# Altium PCB Sensor.PcbDoc
Units mm, origin at the board's own origin, x right, y up, seen from the top; angles counter-clockwise.
Board outline 35 x 15 mm, 4 copper layers (Top Layer 1, Top Layer 2, Bottom Layer 3, Bottom Layer 4), stack 0.603 mm thick; 64 components, 54 nets, 223 pads, 83 vias.
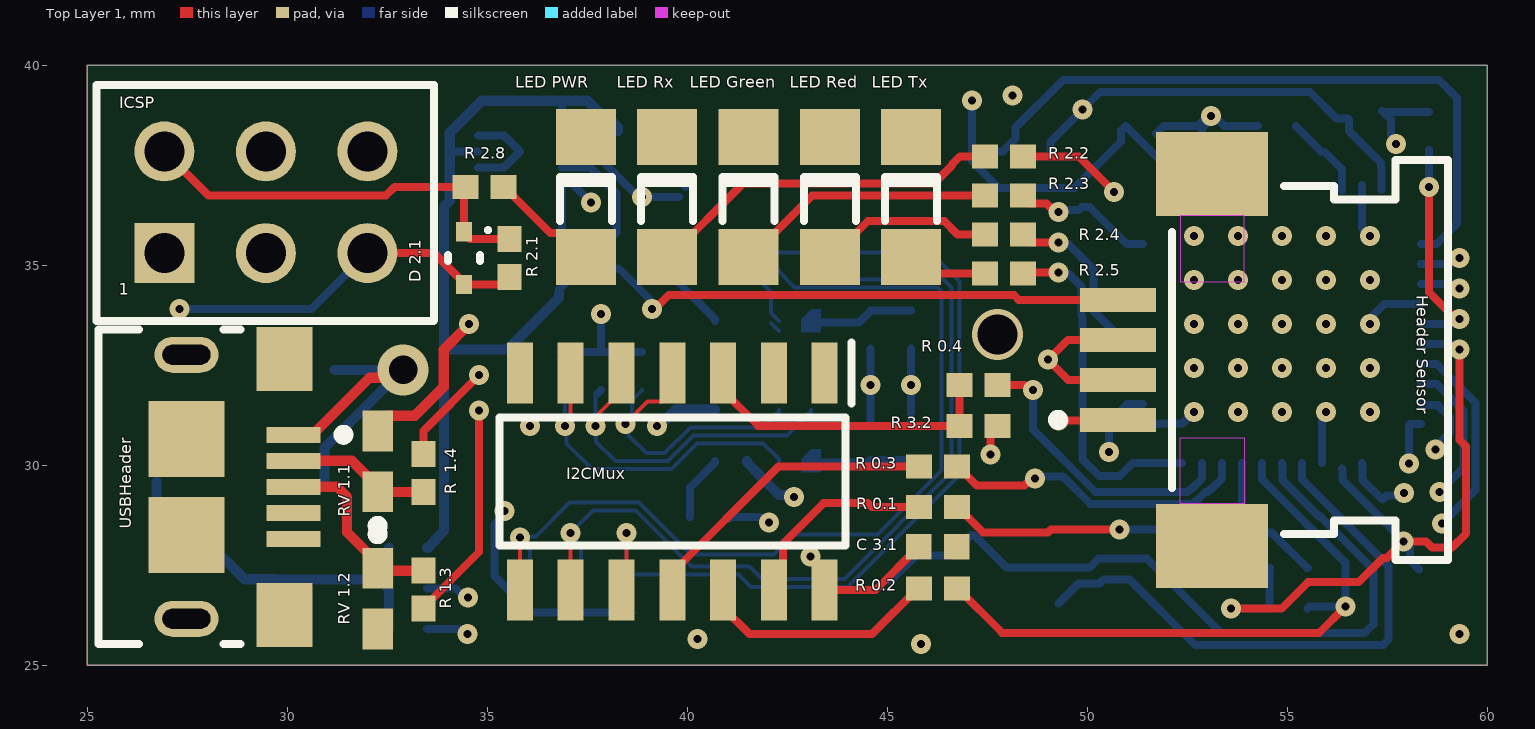
[diagram p0: Top Layer 1 view]
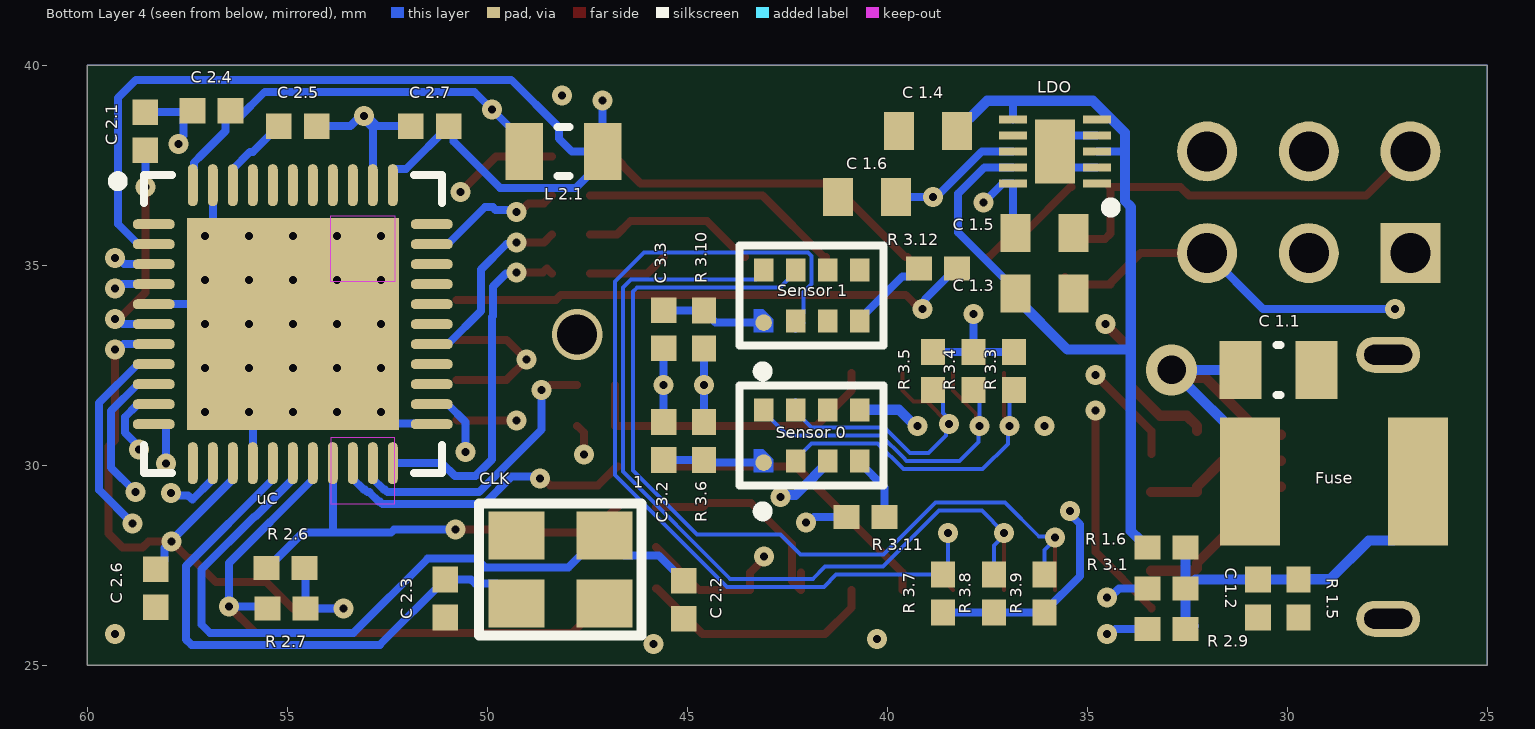
[diagram p1: Bottom Layer 4 view, seen from below]
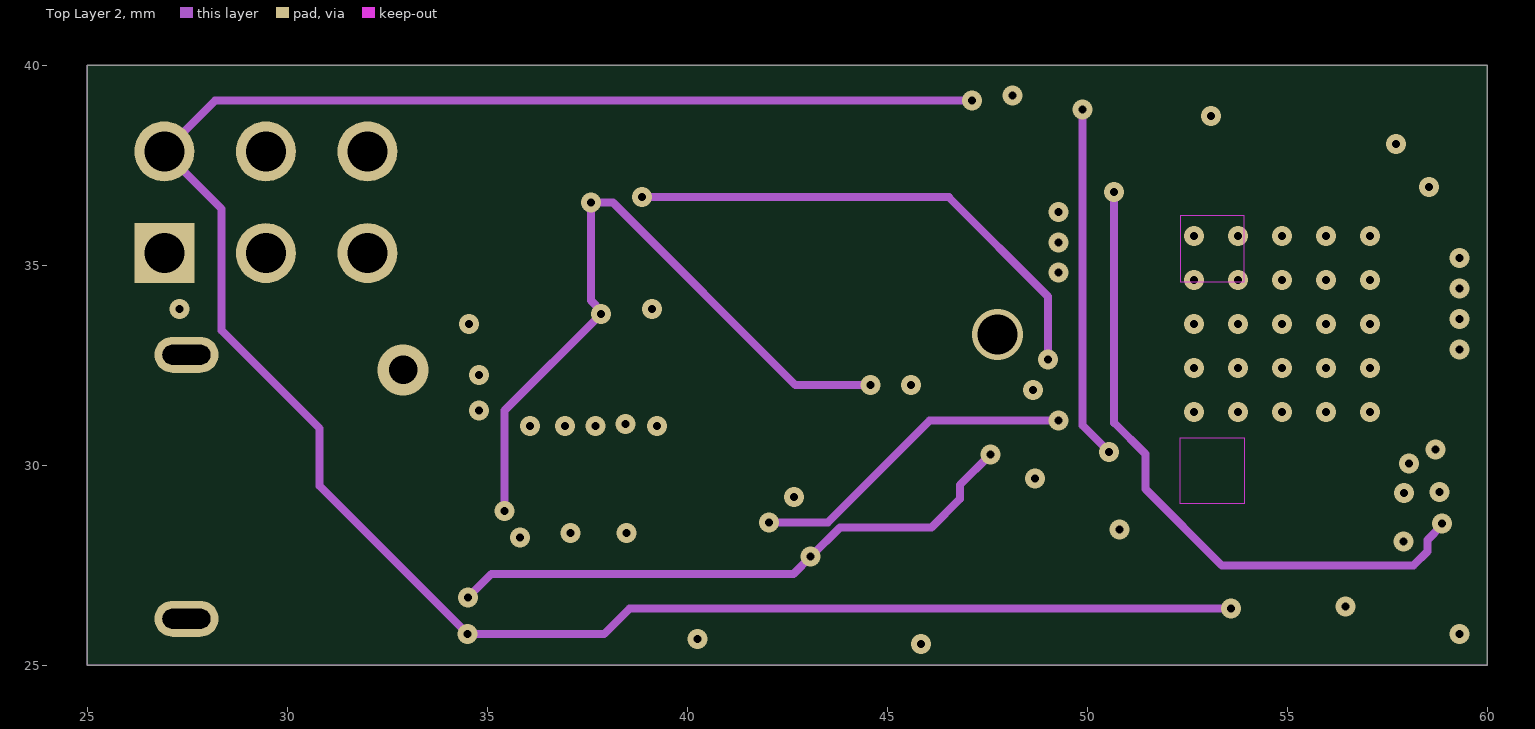
[diagram p2: Top Layer 2]
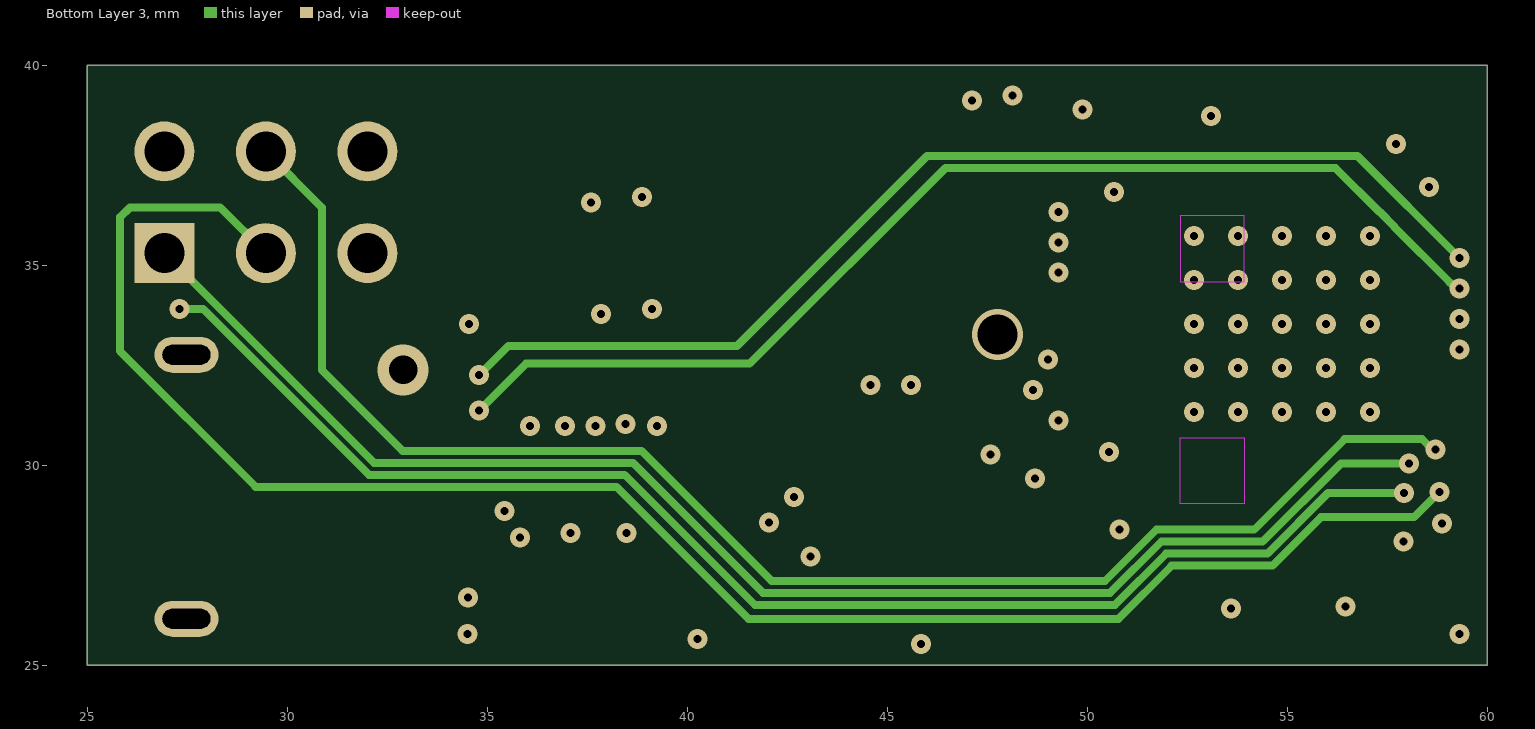
[diagram p3: Bottom Layer 3]

## Layer stack, top to bottom
Top Solder: solder mask 0.0102, Solder Resist, Dk 3.5
Top Layer 1: signal copper 0.035
Dielectric 2: prepreg 0.0711, PP-006, Dk 4.1
Top Layer 2: signal copper 0.0356
Dielectric 1: dielectric 0.32, FR-4, Dk 4.8
Bottom Layer 3: signal copper 0.0356
Dielectric 3: prepreg 0.0711, PP-006, Dk 4.1
Bottom Layer 4: signal copper 0.035
Bottom Solder: solder mask 0.0102, Solder Resist, Dk 3.5

## Board outline
25,25 25,40 60,40 60,25

## Design rules (kind name [scope] priority, off if disabled: settings)
Clearance [All] p1: gap=0.254 ignorepadtopadclearanceinfootprint=FALSE except(0: Arc-Hole Track-Hole SMDPad-Hole THPad-Hole Via-Hole Fill-Hole Poly-Hole Region-Hole Text-Hole; 0.1: Arc-Arc Arc-Track Arc-SMDPad Track-Track Track-SMDPad SMDPad-SMDPad)
PolygonConnect [All] p1: connectstyle=Direct reliefconductorwidth=0.254 reliefentries=4 polygonreliefangle="90 Angle" airgapwidth=0.254
RoutingVias [All] p1: holewidth=0.711 width=1.27 viastyle="Through Hole" minholewidth=0 minwidth=0 maxholewidth=0.711 maxwidth=1.27
SolderMaskExpansion [All] p1: expansion=0.102 istentingtop=FALSE
Width [All] p1: maxlimit=0.254 minlimit=0.1 preferedwidth=0.254 minimp=50.000000 maximp=50.000000 favimp=50.000000
30 further rules are at their usual default settings.

## Classes and differential pairs
component class U_USB: "C 1.1" "C 1.2" "C 1.3" "C 1.4" "C 1.5" "C 1.6" Fuse LDO "R 1.3" "R 1.5" "R 1.6" "R  1.4" "RV 1.1" "RV 1.2" USBHeader
component class U_Sensors: "C 3.1" "C 3.2" "C 3.3" "Header Sensor" I2CMux "R 3.1" "R 3.2" "R 3.3" "R 3.4" "R 3.5" "R 3.6" "R 3.7" "R 3.8" "R 3.9" "R 3.10" "R 3.11" "R 3.12" "Sensor 0" "Sensor 1"
component class U_ATMega32U4: "C 2.1" "C 2.2" "C 2.3" "C 2.4" "C 2.5" "C 2.6" "C 2.7" CLK "D 2.1" ICSP "L 2.1" "LED Green" "LED PWR" "LED Red" "LED Rx" "LED Tx" "R 2.1" "R 2.2" "R 2.3" "R 2.4" "R 2.5" "R 2.6" "R 2.7" "R 2.8" "R 2.9" uC
component class Main: "R 0.1" "R 0.2" "R 0.3" "R 0.4"

## Components (designator, comment, footprint, x,y, rotation, side; value= is the part's Value field where it differs from the comment)
"C 1.1" "0805" C0805_M 30.226,32.385 r0 bottom value=22u
"C 1.2" "0402" C0402_M 30.734,26.67 r90 bottom value=100n
"C 1.3" "0603" C0603_M 36.068,34.29 r0 bottom value=10u
"C 1.4" "0603" C0603_M 38.989,38.354 r180 bottom value=10u
"C 1.5" "0603" C0603_M 36.068,35.814 r0 bottom value=10u
"C 1.6" "0603" C0603_M 40.513,36.703 r180 bottom value=10u
"C 2.1" "0402" C0402_M 58.547,38.354 r90 bottom value=1u
"C 2.2" "0402" C0402_M 45.085,26.637 r90 bottom value=22p
"C 2.3" "0402" C0402_M 51.054,26.67 r90 bottom value=22p
"C 2.4" "0402" C0402_M 56.896,38.862 r180 bottom value=1u
"C 2.5" "0402" C0402_M 54.737,38.481 r180 bottom value=100n
"C 2.6" "0402" C0402_M 58.293,26.924 r90 bottom value=100n
"C 2.7" "0402" C0402_M 51.435,38.481 r180 bottom value=100n
"C 3.1" "0402" C0402_M 46.256,27.96 r180 top value=100n
"C 3.2" "0402" C0402_M 45.593,30.607 r90 bottom value=100n
"C 3.3" "0402" C0402_M 45.593,33.401 r270 bottom value=100n
CLK "7M-16.000MAAE-T" 7M-16.000MAAE-T 48.176,27.393 r0 bottom
"D 2.1" "NSV1SS400T1G" ONSC-SOD-523-2-502-01_V 34.417,35.179 r270 top
Fuse "MF-MSMF050-2" BOUR-MF-MSMF050-2_V 28.829,29.591 r180 bottom
"Header Sensor" "52207-0433" MOLX-52207-0433 51.943,32.639 r90 top
I2CMux "" SOIC127P600X175-14N 39.624,29.591 r270 top
ICSP "Pin Header" PH2,54mm-3x2 26.824,35.306 r0 top
"L 2.1" "MH2029-300Y" L0805_M 48.097,37.846 r180 bottom value=100n
LDO "TLV751180330PDSQR" SON40P200X200X80-11N 35.814,37.846 r0 bottom
"LED Green" "150120GS75000" 1206_A 41.529,36.703 r270 top
"LED PWR" "150120BS75000" 1206_A 37.465,36.703 r270 top
"LED Red" "150120RS75000" 1206_A 43.561,36.703 r270 top
"LED Rx" "150120YS75000" 1206_A 39.497,36.703 r270 top
"LED Tx" "150120YS75000" 1206_A 45.593,36.703 r270 top
"R 0.1" "0402" R0402_M 46.261,28.956 r180 top value=0R
"R 0.2" "0402" R0402_M 46.261,26.924 r180 top value=0R
"R 0.3" "0402" R0402_M 46.261,29.972 r180 top value=0R
"R 0.4" "0402" R0402_M 47.277,32.004 r180 top value=0R
"R 1.3" "0402" R0402_M 33.401,26.891 r270 top value=22R
"R 1.5" "0402" R0402_M 29.718,26.675 r90 bottom value=10k
"R 1.6" "0402" R0402_M 33.02,27.94 r180 bottom value=0R
"R 2.1" "0402" R0402_M 35.56,35.179 r90 top value=10k
"R 2.2" "0402" R0402_M 47.912,37.719 r180 top value=1k
"R 2.3" "0402" R0402_M 47.912,36.745 r0 top value=1k
"R 2.4" "0402" R0402_M 47.912,35.772 r0 top value=1k
"R 2.5" "0402" R0402_M 47.912,34.798 r0 top value=1k
"R 2.6" "0402" R0402_M 55.047,27.432 r180 bottom value=4K7
"R 2.7" "0402" R0402_M 55.024,26.416 r180 bottom value=4K7
"R 2.8" "0402" R0402_M 34.925,36.957 r180 top value=1k
"R 2.9" "0402" R0402_M 33.02,25.908 r180 bottom value=0R
"R 3.1" "0402" R0402_M 33.02,26.924 r0 bottom value=0R
"R 3.2" "0402" R0402_M_open 47.277,30.988 r180 top value=0R
"R 3.3" "0402" R0402_M 36.83,32.352 r90 bottom value=2k2
"R 3.4" "0402" R0402_M 37.846,32.352 r90 bottom value=2k2
"R 3.5" "0402" R0402_M 38.862,32.352 r90 bottom value=2k2
"R 3.6" "0402" R0402_M 44.577,30.607 r270 bottom value=0R
"R 3.7" "0402" R0402_M 38.608,26.797 r270 bottom value=2k2
"R 3.8" "0402" R0402_M 37.338,26.797 r270 bottom value=2k2
"R 3.9" "0402" R0402_M 36.068,26.797 r270 bottom value=2k2
"R 3.10" "0402" R0402_M 44.577,33.401 r90 bottom value=0R
"R 3.11" "0402" R0402_M 40.546,28.702 r180 bottom value=10R
"R 3.12" "0402" R0402_M 38.735,34.925 r180 bottom value=10R
"R  1.4" "0402" R0402_M 33.401,29.812 r90 top value=22R
"RV 1.1" "CG0603MLC-05E" BOUR-CG0603-2_V 32.258,30.097 r90 top
"RV 1.2" "CG0603MLC-05E" BOUR-CG0603-2_V 32.258,26.668 r270 top
"Sensor 0" "AS7341-DLGM" FP-AS7341-DLGM-MFG 41.891,30.75 r90 bottom
"Sensor 1" "AS7341-DLGM" FP-AS7341-DLGM-MFG 41.891,34.25 r90 bottom
uC "ATmega32U4-MU" 44PW_M 54.864,33.528 r180 bottom
USBHeader "10118193-0001LF" FCI-10118193-0001LF-5_V 28.829,29.464 r270 top

## Footprints (in the part's own frame and the unit in brackets; to place one, negate y for a bottom-side part, rotate by r counter-clockwise, add the part's x,y. Pads: shape width x height; smd on the part's side, far side on the other; paste and mask are expansions set on the pad)
7M-16.000MAAE-T [mm]
  rect 1.4x1.2 smd: 1(-1.1,-0.85) 2(1.1,-0.85) 3(1.1,0.85) 4(-1.1,0.85)
  silkscreen extent -2.03,-1.65 2.03,1.65
44PW_M [mm] "QFN, 44-Leads, Body 7x7mm, Pitch 0.5mm, Thermal Pad 5.3x5.3mm, IPC Low Density"
  oval 1.05x0.25 smd: 1(-3.475,2.5) 2(-3.475,2) 3(-3.475,1.5) 4(-3.475,1) 5(-3.475,0.5) 6(-3.475,0) 7(-3.475,-0.5) 8(-3.475,-1) 9(-3.475,-1.5) 10(-3.475,-2) 11(-3.475,-2.5) 23(3.475,-2.5) 24(3.475,-2) 25(3.475,-1.5) 26(3.475,-1) 27(3.475,-0.5) 28(3.475,0) 29(3.475,0.5) 30(3.475,1) 31(3.475,1.5) 32(3.475,2) 33(3.475,2.5)
  oval 0.25x1.05 smd: 12(-2.5,-3.475) 13(-2,-3.475) 14(-1.5,-3.475) 15(-1,-3.475) 16(-0.5,-3.475) 17(0,-3.475) 18(0.5,-3.475) 19(1,-3.475) 20(1.5,-3.475) 21(2,-3.475) 22(2.5,-3.475) 34(2.5,3.475) 35(2,3.475) 36(1.5,3.475) 37(1,3.475) 38(0.5,3.475) 39(0,3.475) 40(-0.5,3.475) 41(-1,3.475) 42(-1.5,3.475) 43(-2,3.475) 44(-2.5,3.475)
  rect 5.3x5.3 smd: 45(0,0)
  silkscreen extent -4.5,-3.73 3.73,3.73, body extent -3.57,-3.58 3.58,3.57, height 0.9
1206_A [mm] "Chip LED, 2-Leads, Body 3.2x1.6mm, IPC Medium Density"
  rect 1.4x1.5 smd: 1(-1.5,0) 2(1.5,0)
  silkscreen extent -0.5,-0.66 0.6,0.65, body extent -1.6,-0.8 1.6,0.8, height 0.68
BOUR-CG0603-2_V [mm] "SMD, 2-Leads, Body 1.6x0.8mm, Pitch 1.52mm"
  rect 1.02x0.76 smd: 1(-0.76,0) 2(0.76,0)
  silkscreen extent -1.94,-0.13 -1.7,0.12, body extent -0.8,-0.4 0.8,0.4, height 0.55
BOUR-MF-MSMF050-2_V [mm] "SMD, 2-Leads, Body 4.55x3.24mm"
  rect 1.5x3.2 smd: 1(-2.1,0) 2(2.1,0)
  body extent -2.28,-1.62 2.28,1.62, height 0.85
C0402_M [mm] "Cap 0402(M1005) Medium Density"
  rect 0.64x0.64 smd: 1(-0.475,0) 2(0.475,0)
  body extent -0.56,-0.3 0.56,0.3, height 0.56
C0603_M [mm] "Cap 0603(M1608) Medium Density"
  rect 0.75x0.95 smd: 1(-0.725,0) 2(0.725,0)
  body extent -0.85,-0.45 0.85,0.45, height 0.86
C0805_M [mm] "Cap 0805(M2012) Medium Density"
  rect 1.05x1.45 smd: 1(-0.95,0) 2(0.95,0)
  silkscreen extent -0.05,-0.62 0.05,0.63, body extent -1.07,-0.7 1.08,0.7, height 1.4
FCI-10118193-0001LF-5_V [mm] "Micro, USB-B, 5-Leads, Body 7.86x5.05mm, Pitch 0.65 mm"
  rect 0.4x1.35 smd: 1(-1.3,1.325) 2(-0.65,1.325) 3(0,1.325) 4(0.65,1.325) 5(1.3,1.325)
  rect 1.6x1.4 smd: 6(-3.2,1.1) 7(3.2,1.1)
  rect 1.9x1.9 smd: 8(-1.2,-1.35) 9(1.2,-1.35)
  oval 0.9x1.6 hole 0.5 slot 1.2 at 90 deg: 10(-3.3,-1.35) 11(3.3,-1.35)
  silkscreen extent -3.93,-3.55 3.93,2.7, body extent -3.93,-4.16 3.93,1.5, height 2.83
FP-AS7341-DLGM-MFG [mm]
  round 0.414 smd paste+0 mask+0: 1(-0.681,1.2)
  rect 0.575x0.488 smd paste+0 mask+0: 2(-0.638,0.4) 3(-0.638,-0.4) 4(-0.638,-1.2) 5(0.638,-1.2) 6(0.638,-0.4) 7(0.638,0.4) 8(0.638,1.2)
  Top Layer 1 region: -0.925,1.444 -0.35,1.444 -0.35,1.206 -0.6,0.956 -0.925,0.956 -0.925,1.444
  silkscreen extent -2.02,-1.8 1.25,1.8, body extent -1,-1.55 1,1.55, height 2
L0805_M [mm] "Inductor 0805(M2012) Medium Density"
  rect 0.94x1.43 smd: 1(-0.98,0) 2(0.98,0)
  silkscreen extent -0.15,-0.61 0.15,0.61, body extent -1.07,-0.7 1.08,0.7, height 0.6
MOLX-52207-0433 [mm] "FPC Connector, 4-Leads, Right Angle, Pitch 1.0 mm, Mated Height 2.7 mm, SMT"
  rect 0.6x1.9 smd: 1(-1.5,1.175) 2(-0.5,1.175) 3(0.5,1.175) 4(1.5,1.175)
  rect 2.1x2.8 smd: MP1(-4.65,-1.175) MP2(4.65,-1.175)
  Keep-Out Layer region: -3.6,-0.375 -1.95,-0.375 -1.95,-1.975 -3.6,-1.975
  Keep-Out Layer region: 3.6,-0.375 1.95,-0.375 1.95,-1.975 3.6,-1.975
  silkscreen extent -5,-7.08 5,2.8, body extent -5.15,-7.07 5.15,1.83, height 2.71
ONSC-SOD-523-2-502-01_V [mm] "SOD, 2-Leads, Body 1.2x0.8mm"
  rect 0.48x0.4 smd: 1(-0.66,0) 2(0.66,0)
  silkscreen extent -0.75,-0.4 0.07,0.65, body extent -0.6,-0.4 0.6,0.4, height 0.7
PH2,54mm-3x2 [mm]
  rect 1.5x1.5 hole 1: 1(0.1,0)
  round 1.5 hole 1: 2(0.1,2.54) 3(2.64,0) 4(2.64,2.54) 5(5.18,0) 6(5.18,2.54)
  silkscreen extent -1.6,-1.7 6.85,4.2, body extent -1.17,-1.27 6.45,3.81, height 8.19
R0402_M [mm] "Res 0402(M1005) Medium Density"
  rect 0.65x0.6 smd: 1(-0.475,0) 2(0.475,0)
  body extent -0.56,-0.3 0.56,0.3, height 0.35
R0402_M_open [mm] "Res 0402(M1005) Open Medium Density"
  rect 0.65x0.6 smd: 1(-0.475,0) 2(0.475,0)
  body extent -0.56,-0.3 0.56,0.3, height 0.35
SOIC127P600X175-14N [mm]
  rect 1.525x0.65 smd: 1(-2.712,3.81) 2(-2.712,2.54) 3(-2.712,1.27) 4(-2.712,0) 5(-2.712,-1.27) 6(-2.712,-2.54) 7(-2.712,-3.81) 8(2.712,-3.81) 9(2.712,-2.54) 10(2.712,-1.27) 11(2.712,0) 12(2.712,1.27) 13(2.712,2.54) 14(2.712,3.81)
  silkscreen extent -3.47,-4.33 1.6,4.48, body extent -3,-4.33 3,4.33, height 1.75
SON40P200X200X80-11N [mm]
  rect 0.7x0.2 smd: 1(-1.05,0.8) 2(-1.05,0.4) 3(-1.05,0) 4(-1.05,-0.4) 5(-1.05,-0.8) 6(1.05,-0.8) 7(1.05,-0.4) 8(1.05,0) 9(1.05,0.4) 10(1.05,0.8)
  rect 1x1.6 smd: 11(0,0)
  silkscreen extent -1.52,1.28 -1.27,1.52, body extent -1.05,-1 1.05,1, height 0.8

## Part data
"C 1.1": library part C0805_X5R_22u_20%, "Capacitor", Manufactor=Walsin, ManufactorPartNumber=0805X226M6R3CT, Supplier Part Number 1=2497053, TempRating="-55°C to +125°C", Tolerance=20%, VoltageRating=6.3V, Part Number=C0805_X5R_22u_20%, Supplier 1=Farnell, Tech="MLCC X5R", Type=Capacitor
"C 1.2" "C 2.5" "C 2.6" "C 2.7": library part C0402_X7R_100n_10%, "Capacitor", Manufactor=Yageo, ManufactorPartNumber=CC0402KRX7R7BB104, Supplier Part Number 1=9402047, TempRating="-55°C to +125°C", Tolerance=10%, VoltageRating=16V, Part Number=C0402_X7R_100n_10%, Supplier 1=Farnell, Tech="MLCC X7R", Type=Capacitor
"C 1.3" "C 1.4" "C 1.5" "C 1.6": library part C0603_X5R_10u_10%, "Capacitor", Manufactor=Yageo, ManufactorPartNumber=CC0603MRX5R5BB106, Supplier Part Number 1=1458902, TempRating="-55°C to +85°C", Tolerance=10%, VoltageRating=6,3V, Part Number=C0603_X5R_10u_10%, Supplier 1=Farnell, Tech="MLCC X5R", Type=Capacitor
"C 2.1" "C 2.4": library part C0402_X5R_1u_10V_WE, "Capacitor", Manufactor="WURTH ELEKTRONIK", ManufactorPartNumber=885012105012, Supplier Part Number 1=732-7489-1-ND, TempRating="-55°C to +125°C", Tolerance=±20%, VoltageRating=10V, Part Number=C0402_X5R_1u_10V_WE, Supplier 1=Digi-Key, Tech=X5R, Type=Capacitor
"C 2.2" "C 2.3": library part C0402_NP0_22p_50V_WE, "Capacitor", Manufactor="WURTH ELEKTRONIK", ManufactorPartNumber=885012005057, Supplier Part Number 1=732-7471-1-ND, TempRating="-55°C to +125°C", Tolerance=±5%, VoltageRating=50V, Part Number=C0402_NP0_22p_50V_WE, Supplier 1=Digi-Key, Tech=NP0, Type=Capacitor
"C 3.1" "C 3.2" "C 3.3": library part C0402_X5R_100n_10%, "Capacitor", Manufactor=Yageo, ManufactorPartNumber=CC0402KRX5R7BB104, Supplier Part Number 1=1816750, TempRating="-55°C to +85°C", Tolerance=10%, VoltageRating=16V, Part Number=C0402_X5R_100n_10%, Supplier 1=Farnell, Supplier 2=Digi-Key, Supplier Part Number 2=311-1347-1-ND, Tech="MLCC X5R", Type=Capacitor
"D 2.1": library part CMP-1054-00078-1, "High-Speed Switching Diode, 2-Pin SOD-523, Pb-Free, Tape and Reel", Manufacturer="On Semiconductor", ComponentLink1Description="Manufacturer URL", ComponentLink1URL=http://www.onsemi.com/, ComponentLink2Description=Datasheet, ComponentLink2URL=http://www.onsemi.com/pub_link/Collateral/1SS400T1-D.PDF, ComponentLink3Description="Package Specification", ComponentLink3URL=http://www.onsemi.com/pub_link/Collateral/502-01.PDF, Configuration=Single, DatasheetVersion="Rev. 7", IF Max (A)=0.2, Mounting Technology="Surface Mount", PackageDescription="2-Pin SOD, Body 1.2 x 0.8 mm", PackageReference=SOD-523-2-502-01, PackageVersion="Rev. E, 09/2010", Packing="Tape and Reel", PartNumber=NSV1SS400T1G, RoHS=TRUE, trr Max (ns)=4
Fuse: library part CMP-2100-03653-1, "PTC Resettable Fuse, 15 V, 500 mA, -40 to 85 degC, 2-Pin SMD, RoHS, Tape and Reel", Case Code (Imperial)=1812, Case Code (Metric)=4532, Current Rating=100A, Manufacturer=Bourns, Max Operating Temperature=85degC, Min Operating Temperature=-40degC, Package Description="2-Pin Surface Mount Device, Body 4.55 x 3.24 mm", Package Quantity=2000, Power Dissipation=800mW, Resistance=150mOhm, Supply Voltage=15V, Case/Package=1812, Contact Plating=Gold, Datasheet URL=http://www.bourns.com/docs/Product-Datasheets/mfmsmf.pdf, Datasheet Version="Rev. AG, 08/2016", Height=0.85mm, Lead Free=LeadFree, Length=4.73mm, Manufacturer URL=http://www.bourns.com/, Max Current Rating=100A, Mount=SurfaceMount, Number of Terminals=2, Package Reference=MF-MSMF050-2, Packaging=TapeandReel, Radiation Hardening=No, REACH SVHC=NoSVHC, RoHSCompliant=true, Termination=SMD/SMT, Voltage Rating=15V, Voltage Rating (DC)=15V, Width=3.41mm
"Header Sensor": library part CMP-1241-00170-1, "1.0 mm Pitch Easy-On(TM) Type FPC Connector, 2.7 mm Mated Height, Right Angle, ZIF, SMT, Top Contact, 4 Circuits, -40 to 85 degC, ELV and RoHS Compliant, Tape and Reel", Current (Max per Contact)=1A, Manufacturer=Molex, Voltage (Max)=125V, Circuits (Loaded)=4, ComponentLink1Description="Manufacturer URL", ComponentLink1URL=http://www.molex.com/molex/index.jsp, ComponentLink2Description=Datasheet, ComponentLink2URL=http://www.molex.com/webdocs/datasheets/pdf/en-us/0522070433_FFC_FPC_CONNECTORS.pdf, ComponentLink3Description="Package Specification", ComponentLink3URL=http://www.molex.com/pdm_docs/sd/522070433_sd.pdf, Contact Position=Top, Durability (mating cycles max)=30, Entry Angle="90degrees Angle", Mated Height=2.70mm, Material - Metal="Phosphor Bronze", Material - Plating Mating="Silver, Tin-Bismuth", Material - Plating Termination="Silver, Tin-Bismuth", Mounting Technology="Surface Mount", Number of Rows=1, Orientation="Right Angle", PackageDescription="4-Lead FPC Connector, Pitch 1.0 mm", PackageReference=52207-0433, PackageVersion="Rev. B, 08/2013", Packing="Tape and Reel", PartNumber=52207-0433, PCB Locator=No, PCB Retention=Yes, Pitch - Mating Interface=1.00mm, Pitch - Termination Interface=1.00mm, Polarized to PCB=Yes, RoHS=TRUE, Stackable=No
I2CMux: library part TCA9543ADR, "Integrated Circuit", Manufacturer_Name="Texas Instruments", Mouser Part Number=595-TCA9543ADR, Arrow Part Number=TCA9543ADR, Arrow Price/Stock=https://www.arrow.com/en/products/tca9543adr/texas-instruments, Datasheet Link=http://www.ti.com/lit/gpn/tca9543a, Height=1.75mm, Manufacturer_Part_Number=TCA9543ADR, Mouser Price/Stock=https://www.mouser.co.uk/ProductDetail/Texas-Instruments/TCA9543ADR/?qs=WuTGPxIYnC6YhvyolILbYg%3D%3D
ICSP: library part PH2,54mm-2x3, Part Number=PH2,54mm-2x3
"L 2.1": library part L0805_100n_2%, CurrentRating=400mA, Manufactor=Coilcraft, ManufactorPartNumber=0805CS-101XJLC, Supplier Part Number 1=2286419, TempRating="-40°C bis 125°C", Tolerance=2%, Kind=General, Part Number=L0805_100n_2%, Supplier 1=Farnell
LDO: "Integrated Circuit", Manufacturer_Name="Texas Instruments", Mouser Part Number=595-LV751180330PDSQR, Arrow Part Number=TLV751180330PDSQR, Arrow Price/Stock=https://www.arrow.com/en/products/tlv751180330pdsqr/texas-instruments, Datasheet Link=https://www.arrow.com/en/products/tlv751180330pdsqr/texas-instruments, Height=0.8mm, Manufacturer_Part_Number=TLV751180330PDSQR, Mouser Price/Stock=https://www.mouser.co.uk/ProductDetail/Texas-Instruments/TLV751180330PDSQR/?qs=TiOZkKH1s2TTHzmF98psZw%3D%3D
"LED Green": library part CMP-1426-00014-1, "SMD mono-color Chip LED, WL-SMCW, Green", Color=Green, Manufacturer="Wuerth Elektronik", ComponentLink1Description="Manufacturer URL", ComponentLink1URL=http://www.we-online.com, ComponentLink2Description=Datasheet, ComponentLink2URL=http://katalog.we-online.com/led/datasheet/150120GS75000.pdf, PackageReference=1206_A, PartNumber=150120GS75000
"LED PWR": library part CMP-1426-00015-1, "SMD mono-color Chip LED, WL-SMCW, Blue", Color=Blue, Manufacturer="Wuerth Elektronik", ComponentLink1Description="Manufacturer URL", ComponentLink1URL=http://www.we-online.com, ComponentLink2Description=Datasheet, ComponentLink2URL=http://katalog.we-online.com/led/datasheet/150120BS75000.pdf, PackageReference=1206_A, PartNumber=150120BS75000
"LED Red": library part CMP-1426-00013-1, "SMD mono-color Chip LED, WL-SMCW, Red", Color=Red, Manufacturer="Wuerth Elektronik", ComponentLink1Description="Manufacturer URL", ComponentLink1URL=http://www.we-online.com, ComponentLink2Description=Datasheet, ComponentLink2URL=http://katalog.we-online.com/led/datasheet/150120RS75000.pdf, PackageReference=1206_A, PartNumber=150120RS75000
"LED Rx" "LED Tx": library part CMP-1426-00019-1, "SMD mono-color Chip LED, WL-SMCW, Yellow", Color=Yellow, Manufacturer="Wuerth Elektronik", ComponentLink1Description="Manufacturer URL", ComponentLink1URL=http://www.we-online.com, ComponentLink2Description=Datasheet, ComponentLink2URL=http://katalog.we-online.com/led/datasheet/150120YS75000.pdf, PackageReference=1206_A, PartNumber=150120YS75000
"R 0.1" "R 0.2" "R 0.3" "R 0.4" "R 1.6" "R 2.9" "R 3.1": library part R0402_1%_0R, "Resistor", Manufactor=Multicomp, ManufactorPartNumber=MC00625W040210R, PowerRating=0,0625W, Supplier Part Number 1=1357983, Tolerance=1%, VoltageRating=50V, Part Number=R0402_1%_0R, Supplier 1=Farnell, Tech=Dickschicht, Type=Resistor
"R 1.3" "R  1.4": library part R0402_1%_220R, "Resistor", Manufactor=Vishay, ManufactorPartNumber=CRCW0402220RFKEDHP, PowerRating=0,125W, Tolerance=1%, VoltageRating=50V, Part Number=R0402_1%_220R, Tech=Dickschicht, Type=Resistor
"R 1.5" "R 2.1": library part R0402_1%_10k, "Resistor", Manufactor=Vishay, ManufactorPartNumber=CRCW040210K0FKEDHP, PowerRating=0,125W, Supplier Part Number 1=541-10.0KYCT-ND, Tolerance=1%, VoltageRating=50V, Part Number=R0402_1%_10k, Supplier 1=Digi-Key, Supplier 2=Farnell, Supplier Part Number 2=1738864, Tech=Dickschicht, Type=Resistor
"R 2.2" "R 2.3" "R 2.4" "R 2.5" "R 2.8": library part R0402_1%_1k, "Resistor", Manufactor=Vishay, ManufactorPartNumber=CRCW04021K00FKED, PowerRating=0,063W, Supplier Part Number 1=541-1.00KLCT-ND, Tolerance=1%, VoltageRating=50V, Part Number=R0402_1%_1k, Supplier 1=Digi-Key, Supplier 2=Farnell, Supplier Part Number 2=1469662, Tech=Dickschicht, Type=Resistor
"R 2.6" "R 2.7": library part R0402_1%_3k3, "Resistor", Manufactor=Yageo, ManufactorPartNumber=RC0402FR-073K3L, PowerRating=0,0625W, Tolerance=1%, VoltageRating=50V, Part Number=R0402_1%_3k3, Tech=Dickschicht, Type=Resistor
"R 3.2": library part Res0402open, "Resistor", Part Number=Res0402open, Type=Resistor
"R 3.3" "R 3.4" "R 3.5" "R 3.7" "R 3.8" "R 3.9": library part R0402_1%_1k, "Resistor", Manufactor=Vishay, ManufactorPartNumber=CRCW04021K00FKED, PowerRating=0,063W, Tolerance=1%, VoltageRating=50V, Part Number=R0402_1%_1k, Tech=Dickschicht, Type=Resistor
"R 3.6" "R 3.10": library part R0402_0R, "Resistor", Manufactor=Yageo, ManufactorPartNumber=RC0402JR-070RL, PowerRating=0,0625W, Supplier Part Number 1=311-0.0JRCT-ND, Tolerance=1%, VoltageRating=50V, Part Number=R0402_0R, Supplier 1=Digi-Key, Tech=Dickschicht, Type=Resistor
"R 3.11" "R 3.12": library part R0402_1%_100R, "Resistor", Manufactor=Vishay, ManufactorPartNumber=CRCW0402100RFKEDHP, PowerRating=0,125W, Tolerance=1%, VoltageRating=50V, Part Number=R0402_1%_100R, Tech=Dickschicht, Type=Resistor
"RV 1.1" "RV 1.2": library part CMP-0584-00001-2, "ESD Protector, 5 V Supply, -40 to 85 degC, 1.6 x 0.8 x 0.55 mm SMD, RoHS, Tape and Reel", Manufacturer=Bourns, Operating Temperature="-40 to 85 degC", CO="0.5 pF", ComponentLink1Description="Manufacturer URL", ComponentLink1URL=http://www.bourns.com/, ComponentLink2Description=Datasheet, ComponentLink2URL=http://www.bourns.com/data/global/pdfs/MLC.pdf, DatasheetVersion="Rev. S", Mounting Technology="Surface Mount", PackageDescription="2-Pin SMD, Body 1.6 x 0.8 mm, Pitch 1.52 mm", PackageReference=CG0603-2, Packing="Tape and Reel", PartNumber=CG0603MLC-05E, RoHS=TRUE, RT="1 ns", VC="20 V", VDC="5 V", VT="150 V"
"Sensor 0" "Sensor 1": library part CMP-22831-000004-1, "SENSOR AMBIENT LIGHT"
uC: library part CMP-0095-00166-2, "8-bit AVR Microcontroller, 2.7-5.5V, 16MHz, 32KB Flash, 1KB EEPROM, 2.5KB SRAM, USB Controller, 44-pin QFN, Industrial Grade (-40°C to 85°C), Ext Osc", Code_JEDEC=MO-220-VKKD-1, ComponentLink1Description="Manufacturer URL", ComponentLink1URL=http://www.atmel.com/, ComponentLink2Description="ATmega16U4/32U4 Datasheet", ComponentLink2URL=http://www.atmel.com/dyn/resources/prod_documents/doc7766.pdf, ComponentLink3Description="ATmega16U4 ATmega32U4 Summary", ComponentLink3URL=http://www.atmel.com/dyn/resources/prod_documents/7766S.pdf, DatasheetVersion="revF, Nov-2010", PackageDescription="44-Pin Quad Flat No-Lead Package, 7 x 7 mm Body, 0.5 mm Pitch (QFN)", PackageReference=44PW, PackageVersion="revG, Sep-2009", RevisionNote="DatasheetVersion, PackageVersion & PCB updated. URLs added."
USBHeader: library part CMP-2000-05119-1, "Micro USB B Type Receptacle, -55 to 85 degC, 5-Pin SMD, RoHS, Tape and Reel", Color=Black, Current Rating=1.8A, Flammability Rating=UL94V-0, Insulation Resistance=1000MOhms, Manufacturer=FCI, Operating Temperature Range=-55Cto+85C, Brand=FCI, Connector Type=MicroUSBTypeBreceptacle, Contact Material=CopperAlloy, Contact Plating=Gold, Datasheet URL=http://datasheet.octopart.com/10118193-0001LF-FCI-datasheet-55953155.pdf, Datasheet Version="Rev. C, 05/2015", Factory Pack Quantity=1200, Gender=Female, Manufacturer URL=http://www.fci.com/, Mounting Angle=Right, Number of Contacts=5Contact, Packaging=Reel, Product=MicroUSBTypeBConnectors, Product Category=USBConnectors, RoHS=Details, Standard=USB2.0, Termination Style=SMD/SMT

## Via types
v1: diameter 0.5, hole 0.2, Top Layer 1 to Bottom Layer 4, 81 vias
v2: diameter 1.27, hole 1, Top Layer 1 to Bottom Layer 4, 1 vias
v3: diameter 1.27, hole 0.711, Top Layer 1 to Bottom Layer 4, 1 vias

## Nets (pads, with @x,y where several pads share a name; then routed paths per layer and width w, separated by ;. In a path a pad name is that pad's centre, name@x,y a point inside that pad or via, vN(x,y) a via of type N, cw(c..) or ccw(c..) an arc to the next point about the centre after c; other vN are vias at no path point)
GND: "C 1.1.1" "C 1.2.1" "C 1.3.1" "C 1.4.1" "C 1.5.1" "C 1.6.1" "C 2.1.2" "C 2.2.1" "C 2.3.1" "C 2.4.1" "C 2.5.2" "C 2.6.1" "C 2.7.1" "C 3.1.1" "C 3.2.2" "C 3.3.2" "Header Sensor.MP1" "Header Sensor.MP2" "LED Green.1" "LED PWR.1" "LED Red.1" "LED Rx.1" "LED Tx.1" "R 1.5.1" "RV 1.1.2" "RV 1.2.2" "Sensor 0.3" "Sensor 0.5" "Sensor 1.3" "Sensor 1.5" CLK.2 CLK.4 I2CMux.1 I2CMux.2 I2CMux.7 ICSP.6 LDO.2 LDO.4 LDO.11 uC.5 uC.15 uC.23 uC.35 uC.43 uC.45 USBHeader.5 USBHeader.6 USBHeader.7 USBHeader.8 USBHeader.9 USBHeader.10 USBHeader.11 | length 23.9
  Top Layer 1 w0.254: 32.258,30.857 32.258,30.987 32.511,31.24 33.185,31.24 33.909,31.964 33.909,32.893 v1(34.544,33.528)
  Bottom Layer 4 w0.2: LDO.2 35.414,37.446 LDO.11 35.414,38.246 LDO.4 ; 45.593,31.082 v1(45.593,32.004) 45.593,32.926 ; uC.23 51.803,31.028 51.818,31.043 52.379,31.043 v1(52.664,31.328) ; 51.721,38.292 51.91,38.481 52.751,38.481 53.005,38.735 v1(53.086,38.735) ; uC.35 52.864,38.432 53.086,38.654 v1(53.086,38.735) ; 54.262,38.481 53.421,38.481 53.167,38.735 v1(53.086,38.735) ; uC.15 55.864,31.228 v1(55.964,31.328) ; uC.43 56.864,35.928 v1(57.064,35.728) ; v1(57.064,33.528) 57.064,33.678 57.414,34.028 uC.5 ; 57.371,38.862 57.404,38.829 ; v1(57.721,38.036) 57.721,38.117 57.591,38.246 57.591,38.642 57.404,38.829 ; 58.547,38.829 57.404,38.829
  Bottom Layer 4 w0.254: v1(39.243,30.988) 39.31,30.988 39.71,31.388 40.691,31.388 ; 41.491,30.112 41.491,30.069 41.82,29.74 41.82,29.73 42.293,29.257 42.625,29.257 v1(42.672,29.21)
  other v1: 45.847,25.527 40.259,25.654 59.309,25.781 53.764,31.328 54.864,31.328 57.064,31.328 52.664,32.428 53.764,32.428 54.864,32.428 55.964,32.428 57.064,32.428 52.664,33.528 53.764,33.528 54.864,33.528 55.964,33.528 52.664,34.628 53.764,34.628 54.864,34.628 55.964,34.628 57.064,34.628 52.664,35.728 53.764,35.728 54.864,35.728 55.964,35.728 48.133,39.243
  other v2: 47.752,33.274
"NetC 1.1_2": "C 1.1.2" Fuse.1 USBHeader.1 | length 8.7
  Top Layer 1 w0.254: USBHeader.1 30.629,30.764 32.056,32.191 32.699,32.191 v3(32.893,32.385)
  Bottom Layer 4 w0.254: Fuse.1 30.929,30.441 v3@32.873,32.385 ; 31.176,32.385 v3@32.873,32.385 ; v3(32.893,32.385) v3@32.873,32.385
"NetC 1.2_2": "C 1.2.2" "R 1.5.2" "R 1.6.2" "R 2.9.2" "R 3.1.1" Fuse.2 | length 9.6
  Bottom Layer 4 w0.254: Fuse.2 26.729,28.741 27.352,28.118 27.964,28.118 28.933,27.15 29.718,27.15 29.72,27.147 30.732,27.147 30.734,27.145 32.299,27.145 32.52,26.924 32.545,26.924 ; 32.339,25.987 32.418,25.908 ; 32.545,25.908 32.545,26.924 ; 32.545,27.94 32.545,26.924
"NetC 1.3_2": "C 1.3.2" "C 1.4.2" "R 1.6.1" LDO.3 LDO.5 LDO.6 LDO.9 | length 24.8
  Bottom Layer 4 w0.2: 34.06,37.846 LDO.3 ; 36.793,34.29 36.793,34.39 38.227,35.824 38.227,36.795 37.576,37.446 LDO.9 ; LDO.6 36.864,39.023 36.957,39.116
  Bottom Layer 4 w0.254: 33.495,27.94 33.52,27.94 33.693,28.113 33.693,28.138 33.913,28.358 33.913,33.267 33.913,36.461 34.06,36.608 34.06,37.846 34.06,38.313 34.863,39.116 36.864,39.116 36.957,39.116 37.502,39.116 37.916,38.702 38.016,38.702 38.264,38.454 38.264,38.354 ; 34.06,32.893 35.496,32.893 36.793,34.19 36.793,34.29
"NetC 1.5_2": "C 1.5.2" "R 3.3.2" "R 3.4.2" "R 3.5.2" "R 3.6.1" "R 3.7.2" "R 3.8.2" "R 3.9.2" "R 3.10.1" LDO.10 | length 30.3
  Top Layer 2 w0.2: v1(35.433,28.86) 35.433,31.369 v1(37.846,33.782) 37.846,33.863 37.592,34.117 v1(37.592,36.576) 37.599,36.569 38.142,36.569 42.707,32.004 v1(44.577,32.004)
  Bottom Layer 4 w0.2: v1(35.433,28.86) 35.433,28.779 35.179,28.525 35.179,27.236 36.068,26.347 36.068,26.322 37.338,26.322 38.608,26.322 ; 36.793,35.814 36.864,35.885 LDO.10 37.114,37.046 37.584,36.576 v1(37.592,36.576) ; 36.83,32.827 37.846,32.827 ; v1(37.846,33.782) 37.846,32.827 ; 38.862,32.827 37.846,32.827 ; 44.577,31.082 v1(44.577,32.004) 44.577,32.926
"NetC 1.6_2": "C 1.6.2" "Header Sensor.2" "Header Sensor.3" LDO.8 | length 20.2
  Top Layer 1 w0.2: 50.768,32.139 49.518,32.139 49.016,32.641 v1(49.02,32.641) 49.518,33.139 50.768,33.139
  Top Layer 2 w0.2: v1(38.862,36.703) 46.537,36.703 49.02,34.22 v1(49.02,32.641)
  Bottom Layer 4 w0.2: LDO.8 37.639,37.846 38.782,36.703 v1(38.862,36.703) 39.788,36.703 ; 39.952,36.957 39.952,37.057
"NetC 2.1_1": "C 2.1.1" uC.6 | length 5.6
  Top Layer 1 w0.2: v1(58.547,36.957) 58.547,34.324 59.158,33.712 59.252,33.712 v1(59.309,33.655)
  Bottom Layer 4 w0.2: uC.6 58.349,33.538 59.11,33.538 59.228,33.655 v1(59.309,33.655) ; v1(58.547,36.957) 58.547,37.879
"NetC 2.2_2": "C 2.2.2" CLK.1 uC.17 | length 18.8
  Bottom Layer 4 w0.2: 45.085,27.112 45.716,27.743 46.576,27.743 CLK.1 47.176,28.243 47.976,27.443 50.059,27.443 50.281,27.665 51.491,27.665 53.344,25.812 56.937,25.812 57.15,26.025 57.15,27.397 55.824,28.723 55.794,28.723 54.88,29.637 54.88,30.037 uC.17
"NetC 2.3_2": "C 2.3.2" CLK.3 uC.16 | length 14.5
  Bottom Layer 4 w0.2: CLK.3 49.776,27.043 50.304,27.043 50.406,27.145 51.054,27.145 52.687,25.512 57.399,25.512 57.531,25.644 57.531,27.486 55.364,29.653 uC.16
"NetC 2.4_2": "C 2.4.2" "L 2.1.1" uC.24 uC.44 | length 21.2
  Top Layer 2 w0.2: v1(49.879,38.894) 49.88,31.001 v1(50.546,30.335)
  Bottom Layer 4 w0.2: 49.077,37.846 49.077,38.091 50.325,39.339 55.563,39.339 56.231,38.672 56.513,38.672 56.543,38.642 56.543,38.359 57.121,37.781 57.339,37.563 57.339,37.442 57.354,37.426 57.354,36.899 uC.44@57.348,36.892 ; v1(50.546,30.335) 50.546,31.085 50.989,31.528 uC.24
"NetC 2.5_1": "C 2.5.1" uC.42 | length 2.1
  Bottom Layer 4 w0.2: 55.212,38.481 55.856,37.837 55.93,37.837 56.364,37.403 uC.42 uC.42@56.364,36.876
"NetC 2.6_2": "C 2.6.2" "C 2.7.2" "D 2.1.1" "L 2.1.2" "R 2.1.2" "R 2.6.2" "R 2.7.2" "R 2.8.2" "R 2.9.1" ICSP.2 uC.2 uC.7 uC.14 uC.34 | length 110.7
  Top Layer 1 w0.2: ICSP.2 28.028,36.742 32.461,36.742 32.676,36.957 34.45,36.957 34.417,36.924 34.417,35.839 34.417,35.799 34.562,35.654 35.56,35.654 ; v1(53.594,26.416) 54.857,26.416 55.518,27.077 56.782,27.077 57.391,27.686 57.487,27.686 v1(57.899,28.098) ; v1@57.956,28.137 57.995,28.098 58.464,28.098 58.617,27.945 59.118,27.945 59.471,28.299 59.471,30.474 59.309,30.637 v1(59.309,32.893)
  Top Layer 2 w0.2: v1(47.117,39.116) 28.194,39.116 ICSP.2 28.36,36.41 28.36,33.37 30.809,30.921 30.809,29.48 v1(34.509,25.781) 37.922,25.781 38.557,26.416 v1(53.594,26.416)
  Bottom Layer 4 w0.2: 33.495,25.908 34.3,25.908 34.427,25.781 v1(34.509,25.781) ; v1(47.117,39.116) 47.117,37.846 ; uC.34 52.364,37.389 52.341,37.413 52.028,37.413 50.96,38.481 50.846,38.367 50.846,38.1 49.677,36.931 47.787,36.931 47.117,37.601 47.117,37.846 ; v1(53.594,26.416) 54.549,26.416 54.549,27.409 54.572,27.432 ; uC.14@56.364,29.926 56.38,29.91 56.38,29.637 57.899,28.118 v1@57.899,28.113 ; v1(57.899,28.098) v1@57.899,28.113 ; 58.293,27.399 58.073,27.619 58.073,27.939 v1@57.899,28.113 ; uC.2 58.728,35.528 59.239,36.039 59.239,39.186 58.786,39.639 49.402,39.639 48.206,38.442 48.206,38.165 47.887,37.846 47.117,37.846 ; uC.7@58.349,33.038 uC.7 59.093,33.028 59.228,32.893 v1(59.309,32.893)
"NetC 3.1_2": "C 3.1.2" "R 3.1.2" "R 3.2.1" I2CMux.14 | length 20.4
  Top Layer 1 w0.2: v1(43.084,27.717) 43.084,27.666 43.434,27.316 I2CMux.14 44.7,26.879 45.781,27.96 ; v1(47.579,30.272) 47.579,30.815 47.752,30.988
  Top Layer 2 w0.2: v1(34.514,26.7) 35.099,27.285 42.652,27.285 v1(43.084,27.717) 43.815,28.448 46.101,28.448 46.811,29.158 46.811,29.504 v1(47.579,30.272)
  Bottom Layer 4 w0.2: 33.495,26.924 34.209,26.924 34.433,26.7 v1(34.514,26.7)
"NetC 3.2_1": "C 3.2.1" "R 3.6.2" "Sensor 0.1" | length 2.5
  Bottom Layer 4 w0.2: 43.091,30.069 44.513,30.069 44.577,30.132 45.593,30.132
"NetC 3.3_1": "C 3.3.1" "R 3.10.2" "Sensor 1.1" | length 2.6
  Bottom Layer 4 w0.2: 43.091,33.569 44.295,33.569 44.577,33.851 44.577,33.876 45.593,33.876
"NetD 2.1_2": "D 2.1.2" "R 2.1.1" ICSP.5 uC.13 | length 45.8
  Top Layer 1 w0.2: ICSP.5 33.67,35.306 34.417,34.559 34.417,34.519 35.375,34.519 35.56,34.704
  Bottom Layer 3 w0.2: v1(27.305,33.909) 27.897,33.909 32.042,29.764 38.435,29.764 41.686,26.513 50.695,26.513 51.973,27.791 54.505,27.791 56.019,29.306 v1(57.912,29.306)
  Bottom Layer 4 w0.2: v1(27.305,33.909) 30.607,33.909 ICSP.5 ; uC.13 56.88,30.037 56.88,29.637 57.377,29.14 57.485,29.249 57.855,29.249 v1(57.912,29.306)
"NetHeader LED_1": 
"NetHeader LED_2": 
"NetHeader LED_3": 
"NetHeader LED_4": 
"NetHeader Sensor_1": "Header Sensor.1" "R 3.11.1" | length 10.9
  Top Layer 1 w0.2: v1(49.275,31.116) 50.745,31.116 50.768,31.139
  Top Layer 2 w0.2: v1(42.037,28.575) 43.518,28.575 46.058,31.115 v1(49.275,31.116)
  Bottom Layer 4 w0.2: 41.054,28.669 41.021,28.702 41.829,28.702 41.956,28.575 v1(42.037,28.575)
"NetHeader Sensor_4": "Header Sensor.4" "R 3.12.2" | length 13.2
  Top Layer 1 w0.2: v1(39.116,33.909) 39.186,33.909 39.54,34.263 48.162,34.263 48.286,34.139 50.768,34.139
  Bottom Layer 4 w0.2: 38.26,34.925 38.285,34.925 39.059,34.151 39.059,33.966 v1(39.116,33.909)
NetI2CMux_3: "R 0.4.2" "R 3.2.2" I2CMux.3 | length 7.7
  Top Layer 1 w0.2: I2CMux.3 40.894,31.866 41.772,30.988 46.802,30.988 46.802,32.004
NetI2CMux_4: "R 3.5.1" "Sensor 0.7" I2CMux.4 | length 7.7
  Top Layer 1 w0.1: v1(38.453,31.037) 39.007,31.591 39.349,31.591 39.624,31.866 I2CMux.4
  Bottom Layer 4 w0.1: 38.862,31.877 38.612,31.627 38.612,31.303 38.453,31.145 v1(38.453,31.037) 38.53,30.96 38.53,30.751 38.974,30.307 39.433,30.307 40.076,30.95 41.896,30.95 42.291,31.344 42.291,31.388 ; 42.291,31.594 42.291,31.638
NetI2CMux_5: "R 3.4.1" "Sensor 0.8" I2CMux.5 | length 9.1
  Top Layer 1 w0.1: v1(37.701,30.987) 37.778,31.063 37.778,31.289 38.354,31.866 I2CMux.5
  Bottom Layer 4 w0.1: 37.746,31.777 37.701,31.732 v1(37.701,30.987) 37.72,30.968 37.72,30.587 38.2,30.107 39.516,30.107 39.599,30.19 40.159,30.75 42.496,30.75 43.091,31.344 43.091,31.388
  Bottom Layer 4 w0.2: 37.746,31.777 37.846,31.877
NetI2CMux_6: "R 3.3.1" "Sensor 0.2" I2CMux.6 | length 8.8
  Top Layer 1 w0.1: v1(36.947,30.988) 36.947,31.096 37.084,31.233 I2CMux.6
  Bottom Layer 4 w0.1: 36.83,31.877 36.947,31.76 v1(36.947,30.988) 36.986,30.95 36.986,30.538 37.617,29.907 39.599,29.907 40.241,30.55 41.897,30.55 42.291,30.156 42.291,30.112
NetI2CMux_8: "R 3.9.1" "Sensor 1.7" I2CMux.8 | length 23.4
  Top Layer 1 w0.1: I2CMux.8 v1(35.814,28.194)
  Bottom Layer 4 w0.1: 36.068,27.272 36.068,27.882 35.814,28.136 v1(35.814,28.194) 35.846,28.226 36.214,28.226 37.055,29.067 38.793,29.067 40.093,27.767 42.171,27.767 42.675,28.271 44.752,28.271 46.355,29.874 46.355,34.347 46.252,34.45 42.685,34.45 42.291,34.844 42.291,34.888
NetI2CMux_9: "R 3.8.1" "Sensor 1.8" I2CMux.9 | length 22.5
  Top Layer 1 w0.1: I2CMux.9 v1(37.084,28.313)
  Bottom Layer 4 w0.1: 37.338,27.272 37.338,28.001 37.084,28.255 v1(37.084,28.313) 37.638,28.867 38.71,28.867 40.105,27.472 41.555,27.472 41.864,27.163 43.927,27.163 46.609,29.845 46.609,34.446 46.404,34.65 43.285,34.65 43.091,34.844 43.091,34.888
NetI2CMux_10: "R 3.7.1" "Sensor 1.2" I2CMux.10 | length 24.2
  Top Layer 1 w0.1: I2CMux.10 38.481,27.006 v1(38.481,28.313)
  Bottom Layer 4 w0.1: v1(38.481,28.313) 38.481,27.399 38.608,27.272 41.279,27.272 41.588,26.963 44.01,26.963 46.809,29.762 46.809,34.598 46.082,35.325 41.985,35.325 41.897,35.238 41.897,34.538 42.097,34.338 42.097,33.806 42.291,33.612 ; 42.097,33.556 42.291,33.362
NetI2CMux_11: "R 0.3.2" I2CMux.11 | length 7.7
  Top Layer 1 w0.2: I2CMux.11 39.624,27.316 42.28,29.972 45.786,29.972
NetI2CMux_12: "R 0.2.2" I2CMux.12 | length 6.1
  Top Layer 1 w0.2: I2CMux.12 40.894,26.441 41.554,25.781 44.618,25.781 45.761,26.924 45.786,26.924
NetI2CMux_13: "R 0.1.2" I2CMux.13 | length 5.5
  Top Layer 1 w0.2: I2CMux.13@42.164,27.316 I2CMux.13 42.389,27.104 42.389,28.038 43.403,29.052 44.515,29.052 44.611,28.956 45.786,28.956
NetICSP_1: ICSP.1 uC.11 | length 37.2
  Bottom Layer 3 w0.2: ICSP.1 32.166,30.064 38.643,30.064 41.894,26.813 50.57,26.813 51.849,28.091 54.38,28.091 56.338,30.049 v1(58.039,30.049)
  Bottom Layer 4 w0.2: v1(58.039,30.049) 58.039,31.005 58.062,31.028 uC.11
NetICSP_3: ICSP.3 uC.9 | length 48.3
  Bottom Layer 3 w0.2: ICSP.3 28.321,36.449 26.066,36.449 25.82,36.203 25.82,32.854 29.21,29.464 38.227,29.464 41.529,26.162 50.78,26.162 52.109,27.491 54.629,27.491 55.84,28.702 58.166,28.702 v1(58.801,29.337)
  Bottom Layer 4 w0.2: uC.9 58.739,32.028 59.405,31.362 59.405,29.941 v1(58.801,29.337)
NetICSP_4: ICSP.4 uC.10 | length 39.5
  Bottom Layer 3 w0.2: ICSP.4 30.861,36.449 30.861,32.385 32.882,30.364 38.851,30.364 42.102,27.113 50.446,27.113 51.725,28.391 54.172,28.391 56.434,30.653 58.372,30.653 58.626,30.399 v1(58.707,30.399)
  Bottom Layer 4 w0.2: uC.10 58.355,31.512 58.755,31.512 59.064,31.203 59.064,30.82 58.707,30.463 v1(58.707,30.399)
"NetLED Green_2": "LED Green.2" "R 2.3.1" | length 6.5
  Top Layer 1 w0.2: 41.529,35.203 41.579,35.203 43.121,36.745 47.437,36.745
"NetLED PWR_2": "LED PWR.2" "R 2.8.1" | length 2.8
  Top Layer 1 w0.2: 35.4,36.957 35.425,36.957 36.579,35.803 36.865,35.803 37.465,35.203
"NetLED Red_2": "LED Red.2" "R 2.4.1" | length 4.4
  Top Layer 1 w0.2: 43.561,35.203 43.611,35.203 44.511,36.103 46.426,36.103 46.757,35.772 47.437,35.772
"NetLED Rx_2": "LED Rx.2" "R 2.2.2" | length 9
  Top Layer 1 w0.2: 39.497,35.203 39.547,35.203 41.389,37.045 46.168,37.045 46.619,37.496 46.619,37.526 46.812,37.719 47.437,37.719
"NetLED Tx_2": "LED Tx.2" "R 2.5.1" | length 2
  Top Layer 1 w0.2: 45.593,35.203 45.998,34.798 47.437,34.798
"NetR 0.1_1": "R 0.1.1" "R 2.6.1" uC.19 | length 11.2
  Top Layer 1 w0.2: 46.736,28.956 46.761,28.956 47.396,28.321 49.02,28.321 49.095,28.395 v1(50.8,28.395)
  Bottom Layer 4 w0.2: v1(50.8,28.395) 52.327,28.395 52.402,28.321 53.848,28.321 ; uC.19 53.864,28.337 53.848,28.321 ; 55.522,27.432 55.497,27.432 54.608,28.321 53.848,28.321
"NetR 0.2_1": "R 0.2.1" "R 2.7.1" uC.18 | length 15.9
  Top Layer 1 w0.2: 46.736,26.924 46.761,26.924 47.873,25.812 55.797,25.812 v1(56.458,26.473)
  Bottom Layer 4 w0.2: uC.18 54.364,29.653 56.458,27.559 v1(56.458,26.473) 55.556,26.473 55.499,26.416
"NetR 0.3_1": "R 0.3.1" uC.20 | length 7.9
  Top Layer 1 w0.2: 46.736,29.972 46.761,29.972 47.238,29.495 48.429,29.495 48.606,29.672 v1(48.687,29.672)
  Bottom Layer 4 w0.2: v1(48.687,29.672) 48.733,29.718 49.395,29.718 50.085,29.028 52.623,29.028 52.688,29.093 52.715,29.093 52.95,29.328 52.999,29.328 53.064,29.393 53.09,29.393 53.364,29.667 uC.20
"NetR 0.4_1": "R 0.4.1" uC.21 | length 7.3
  Top Layer 1 w0.2: 47.752,32.004 48.433,32.004 48.56,31.877 v1(48.641,31.877)
  Bottom Layer 4 w0.2: v1(48.641,31.877) 48.641,30.896 50.209,29.328 52.499,29.328 52.564,29.393 52.59,29.393 52.864,29.667 uC.21
"NetR 1.3_1": "R 1.3.1" "RV 1.2.1" USBHeader.3 | length 4.7
  Top Layer 1 w0.254: USBHeader.3 31.242,29.464 31.496,29.21 31.496,28.32 32.258,27.558 32.258,27.428 32.32,27.366 33.401,27.366
"NetR 1.3_2": "R 1.3.2" uC.4 | length 34.6
  Top Layer 1 w0.2: 33.401,26.416 33.401,26.441 34.798,27.838 v1(34.798,31.369)
  Bottom Layer 3 w0.2: v1(34.798,31.369) 35.97,32.541 41.558,32.541 46.451,37.434 56.2,37.434 57.302,36.332 57.314,36.332 57.668,35.978 57.668,35.966 59.059,34.575 59.069,34.575 59.228,34.415 v1(59.309,34.415)
  Bottom Layer 4 w0.2: uC.4 v1@59.116,34.528
"NetR 2.2_1": "R 2.2.1" uC.8 | length 24.4
  Top Layer 1 w0.2: 48.387,37.719 49.784,37.719 v1(50.673,36.83)
  Top Layer 2 w0.2: v1(50.673,36.83) 50.673,31.062 51.451,30.284 51.451,29.405 53.362,27.494 58.149,27.494 58.503,27.848 58.503,28.136 58.867,28.501 v1(58.867,28.549)
  Bottom Layer 4 w0.2: uC.8 58.739,32.528 59.705,31.562 59.705,29.387 v1(58.867,28.549)
"NetR 2.3_2": "R 2.3.2" uC.32 | length 3.6
  Top Layer 1 w0.2: 48.387,36.745 48.587,36.545 48.976,36.545 49.195,36.327 v1(49.276,36.327)
  Bottom Layer 4 w0.2: v1(49.276,36.327) 49.333,36.384 49.793,36.384 49.863,36.454 50.063,36.454 50.989,35.528 uC.32
"NetR 2.4_2": "R 2.4.2" uC.27 | length 4.7
  Top Layer 1 w0.2: 48.387,35.772 48.586,35.573 v1(49.275,35.573)
  Bottom Layer 4 w0.2: v1(49.275,35.573) 49.319,35.529 49.526,35.529 50.156,34.899 50.156,33.861 50.989,33.028 uC.27
"NetR 2.5_2": "R 2.5.2" uC.22 | length 8.8
  Top Layer 1 w0.2: 48.387,34.798 48.514,34.925 48.514,34.917 48.612,34.819 v1(49.275,34.819)
  Bottom Layer 4 w0.2: v1(49.275,34.819) 49.297,34.798 49.53,34.798 49.856,34.472 49.856,33.736 49.88,33.713 49.88,30.147 50.296,29.731 50.809,29.731 51.131,30.053 uC.22
"NetR 3.11_2": "R 3.11.2" "Sensor 0.4" | length 1.7
  Bottom Layer 4 w0.2: 40.071,28.702 40.071,29.449 40.691,30.069 40.691,30.112
"NetR 3.12_1": "R 3.12.1" "Sensor 1.4" | length 2
  Bottom Layer 4 w0.2: 39.235,34.925 39.435,34.725 39.622,34.725 40.691,33.656 40.691,33.612
"NetR  1.4_1": "R  1.4.1" "RV 1.1.1" USBHeader.2 | length 3.6
  Top Layer 1 w0.254: USBHeader.2 31.611,30.114 32.258,29.467 32.258,29.337 33.401,29.337
"NetR  1.4_2": "R  1.4.2" uC.3 | length 31.8
  Top Layer 1 w0.2: 33.401,30.287 33.401,30.861 v1(34.798,32.258)
  Bottom Layer 3 w0.2: v1(34.798,32.258) 35.525,32.985 41.24,32.985 45.989,37.734 56.754,37.734 v1(59.309,35.179)
  Bottom Layer 4 w0.2: uC.3@58.753,35.028 uC.3 58.349,35.038 59.086,35.038 59.228,35.179 v1(59.309,35.179)
pads on no net: "Sensor 0.6" "Sensor 1.6" LDO.1 LDO.7 uC.1 uC.12 uC.25 uC.26 uC.28 uC.29 uC.30 uC.31 uC.33 uC.36 uC.37 uC.38 uC.39 uC.40 uC.41 USBHeader.4
copper on no net:
  other v1: 36.068,30.988

## Polygon pours and split planes (outlines as drawn)
GND on Top Layer 2 "NONET_L02_P000" (solid, shelved, pour order 0): 25,40 60,40 60,25 25,25
GND on Bottom Layer 3 "NONET_L03_P002" (solid, shelved, pour order 2): 25,40 60,40 60,25 25,25
GND on Top Layer 1 "NONET_L01_P001" (solid, shelved, pour order 1): 25,40 60,40 60,25 25,25
GND on Bottom Layer 4 "NONET_L04_P003" (solid, shelved, pour order 3): 25,40 60,40 60,25 25,25

## Silkscreen, mask and mechanical layers (free items; w line width, h text height)
Mechanical 15:
  the board outline again, w0.254

## Text inside footprints (layer, text, board x,y; h text height)
CLK: Bottom Overlay "1" at 46.355,29.337 h0.5
ICSP: Top Overlay "1" at 25.781,34.163 h0.5